# Altium PCB Gastroscopy-LED.PcbDoc
Units mm, origin at the board's own origin, x right, y up, seen from the top; angles counter-clockwise.
Board outline 4.5 x 4.5 mm, 2 copper layers (Top Layer, Bottom Layer), stack 0.486 mm thick; 8 components, 7 nets, 14 pads, 0 vias.
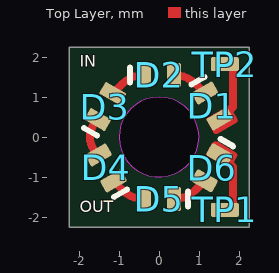
[diagram p0: Top Layer view]
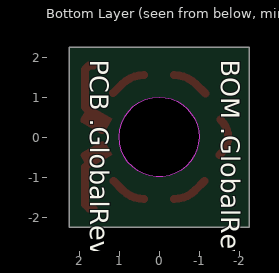
[diagram p1: Bottom Layer view, seen from below]
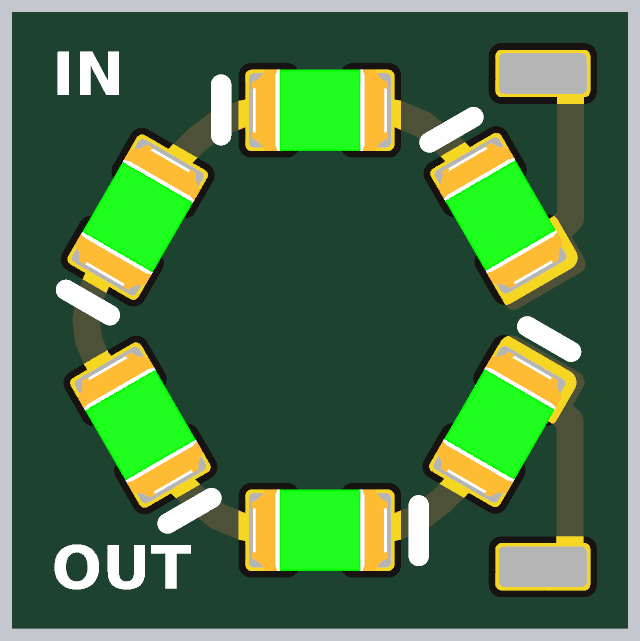
[diagram p2: 3D render of the assembled board from above, using the file's embedded part models]

## Layer stack, top to bottom
Top Solder: solder mask 0.0127, Dk 4
Top Layer: signal copper 0.018
Core 1: core 0.45, Dk 4.2
Bottom Layer: signal copper 0.018
Bottom Solder: solder mask 0.0127, Dk 4

## Board outline
-2.25,-2.25 -2.25,2.25 2.25,2.25 2.25,-2.25
cut-out: 0.776,-0.631 ccw(c0,0) 0,1 ccw(c0,0) -1,0 ccw(c0,0)

## Design rules (kind name [scope] priority, off if disabled: settings)
AcuteAngle [All] p1: minimum=3.50000000000000E+0001 checktracksonly=FALSE
BoardOutlineClearance [All] p1: gap=0.25 ignorepadtopadclearanceinfootprint=FALSE except(0: Arc-SplitContinuation Track-SplitContinuation SMDPad-SplitContinuation THPad-SplitContinuation Via-SplitContinuation Fill-SplitContinuation Poly-SplitContinuation Region-SplitContinuation Text-SplitContinuation) // Milling
Clearance Clearance-18_S [All] p1: gap=0.125 ignorepadtopadclearanceinfootprint=FALSE except(0.2: Arc-Fill Arc-Poly Track-Fill Track-Poly SMDPad-SMDPad SMDPad-Fill SMDPad-Poly THPad-Fill THPad-Poly Via-Fill Via-Poly Fill-Fill Fill-Poly Poly-Poly Poly-Region Poly-Text; 0.25: Arc-Hole Track-Hole SMDPad-Hole THPad-Hole Via-Hole Fill-Hole Poly-Hole Region-Hole Text-Hole) // Standart
ComponentClearance [All] p1: gap=0.5 collisioncheckmode=3 verticalgap=0.25 showdistances=FALSE
DiffPairsRouting "DiffPairsRouting 18" [All] p1: maxlimit=0.254 minlimit=0.1 mostfreqgap=0.25 toplayer_minwidth=0.1 toplayer_maxwidth=0.381 toplayer_prefwidth=0.35 bottomlayer_minwidth=0.1 bottomlayer_maxwidth=0.381 bottomlayer_prefwidth=0.35 maxuncoupledlength=12.7
HoleSize "Minimum HoleSize" [IsPad] p1: absolutevalues=TRUE maxlimit=5.9 minlimit=0.2 maxpercent=80.000 minpercent=20.000
HoleSize "Minimum HoleSize VIA" [IsVia] p2: absolutevalues=TRUE maxlimit=5.9 minlimit=0.2 maxpercent=80.000 minpercent=20.000 // Standart
HoleToHoleClearance Hole2HoleClearance [All] p1: gap=0.25 allowstackedmicrovias=FALSE
MinimumAnnularRing "Minimum AR VIA Standart" [IsVia] p1: minimumring=0.15
MinimumAnnularRing "Minimum AR PAD Standart" [IsPad] p2: minimumring=0.15
MinimumSolderMaskSliver "SolderMask Bridge Standart" [All] p1: minsoldermaskwidth=0.15 // All Masks
PasteMaskExpansion [All] p1: expansion=-0.025
PlaneClearance PlaneClearance-18_S [All] p1: clearance=0.2 // Standart
PlaneConnect TermalConnect-18_S [All] p1: planeconnectstyle=Relief reliefexpansion=0.2 reliefentries=4 reliefconductorwidth=0.2 reliefairgap=0.2 // Standart
PolygonConnect PolygonConnect-IND [HasFootprint('NLC453232T-4R7K-PF') vs InNet('NetD1_2')] p1: connectstyle=Relief reliefconductorwidth=0.75 reliefentries=4 polygonreliefangle="90 Angle" airgapwidth=0.2 // Standart
PolygonConnect PolygonConnect-TP [HasFootprint('TEST_POINT_SMT')] p2: connectstyle=Relief reliefconductorwidth=0.5 reliefentries=4 polygonreliefangle="90 Angle" airgapwidth=0.2 // Standart
PolygonConnect PolygonConnect-18_S [All] p3: thpad.connectstyle=Relief thpad.reliefconductorwidth=0.15 thpad.reliefentries=4 thpad.polygonreliefangle="90 Angle" thpad.airgapwidth=0.2 smdpad.connectstyle=Relief smdpad.reliefconductorwidth=0.2 smdpad.reliefentries=4 smdpad.polygonreliefangle="90 Angle" smdpad.airgapwidth=0.2 via.connectstyle=Direct via.reliefconductorwidth=0.254 via.reliefentries=4 via.polygonreliefangle="90 Angle" via.airgapwidth=0.254 // Standart
RoutingCorners [All] p1 off: cornerstyle=45-Degree minsetback=3 maxsetback=3
RoutingVias RoutingVias_S [All] p1: holewidth=0.3 width=0.45 viastyle="Through Hole" minholewidth=0.3 minwidth=0.45 maxholewidth=5.9 maxwidth=6.4 // Standart
SilkToSilkClearance [All] p1: silktosilkclearance=0.1
SilkToSolderMaskClearance [IsPad] p1: minsilkscreentomaskgap=0.1 clearancetoexposedcopper=TRUE
SolderMaskExpansion SolderMaskExpansion_VIA [IsVia] p1: expansion=0.05 istentingtop=TRUE // Standart
SolderMaskExpansion SolderMaskExpansion-1 [All] p2: expansion=0.05 istentingtop=FALSE // Standart
UnRoutedNet [All] p1: checkbadconnections=TRUE
Width Width-18_S [All] p1: maxlimit=10 minlimit=0.125 preferedwidth=0.2 checkconnectedcopper=TRUE
18 further rules are at their usual default settings.

## Classes and differential pairs
component class Overview: TP1 TP2
component class LED: D1 D2 D3 D4 D5 D6

## Components (designator, comment, footprint, x,y, rotation, side; value= is the part's Value field where it differs from the comment)
D1 "FYLS-0402PGC" L_0402_GREEN 1.333,0.774 r300 top
D2 "FYLS-0402PGC" L_0402_GREEN 0,1.55 r0 top
D3 "FYLS-0402PGC" L_0402_GREEN -1.346,0.762 r60 top
D4 "FYLS-0402PGC" L_0402_GREEN -1.325,-0.773 r120 top
D5 "FYLS-0402PGC" L_0402_GREEN 0,-1.55 r180 top
D6 "FYLS-0402PGC" L_0402_GREEN 1.325,-0.769 r240 top
TP1 "TEST_POINT_SMT" TEST_POINT_SMT 1.646,-1.82 r0 top
TP2 "TEST_POINT_SMT" TEST_POINT_SMT 1.646,1.822 r180 top

## Footprints (in the part's own frame and the unit in brackets; to place one, negate y for a bottom-side part, rotate by r counter-clockwise, add the part's x,y. Pads: shape width x height; smd on the part's side, far side on the other; paste and mask are expansions set on the pad)
L_0402_GREEN [mm] "SMD LED LAMP"
  rrect25% 0.35x0.6 smd mask+0.05: 1(-0.375,0) 2(0.375,0)
  silkscreen extent -0.73,-0.18 -0.73,0.19, body extent -0.5,-0.3 0.5,0.3, height 0.2
TEST_POINT_SMT [mm] "SMT test point, 40 mil pad"
  rrect25% 0.7x0.35 smd mask+0.05: 1(0,0)

## Part data
D1 D2 D3 D4 D5 D6: "LED GREEN CLEAR SMD", Manufacturer 1="Ningbo Foryard Optoelectronics", Manufacturer Part Number 1=FYLS-0402PGC
TP1 TP2: "STM TEST POINT"

## Nets (pads, with @x,y where several pads share a name; then routed paths per layer and width w, separated by ;. In a path a pad name is that pad's centre, name@x,y a point inside that pad or via, vN(x,y) a via of type N, cw(c..) or ccw(c..) an arc to the next point about the centre after c; other vN are vias at no path point)
NetD1_1: D1.1 D2.2 | length 0.9
  Top Layer w0.2: D2.2 cw(c0.375,0.78) 0.92,1.325 D1.1
NetD1_2: D1.2 TP2.1 | length 1.6
  Top Layer w0.2: D1.2 1.547,0.449 1.85,0.752 1.85,1.689 1.75,1.789 TP2.1@1.635,1.789
NetD2_1: D2.1 D3.2 | length 0.9
  Top Layer w0.2: D3.2 -0.92,1.325 cw(c-0.375,0.78) D2.1
NetD3_1: D3.1 D4.2 | length 1
  Top Layer w0.2: D3.1 -1.552,0.418 ccw(c-1.132,-0.003) -1.727,-0.003 ccw(c-1.167,-0.003) -1.563,-0.398 D4.2
NetD4_1: D4.1 D5.2 | length 0.9
  Top Layer w0.2: D4.1 -0.906,-1.33 ccw(c-0.375,-0.8) D5.2
NetD5_1: D5.1 D6.2 | length 0.9
  Top Layer w0.2: D5.1 ccw(c0.375,-0.81) 0.898,-1.333 D6.2
NetD6_1: D6.1 TP1.1 | length 1.7
  Top Layer w0.2: D6.1 1.543,-0.444 1.846,-0.747 1.846,-1.69 1.746,-1.79 TP1.1@1.635,-1.79

## Other copper
Top Layer:
  region net NetD6_1: 1.771,-0.795 1.942,-0.499 ccw(c1.868,-0.457) 1.911,-0.383 1.463,-0.124 ccw(c1.416,-0.205) 1.335,-0.159 1.168,-0.447
  region net NetD1_2: 1.175,0.451 1.372,0.108 ccw(c1.428,0.14) 1.46,0.085 1.925,0.354 ccw(c1.888,0.418) 1.952,0.455 1.76,0.789

## Silkscreen, mask and mechanical layers (free items; w line width, h text height)
Top Overlay:
  text "IN" at -1.977,1.663 h0.5
  text "OUT" at -1.982,-1.982 h0.5
Bottom Overlay:
  text "BOM .GlobalRevisionBOM" at -1.392,1.934 h0.8 r90
  text "PCB .GlobalRevisionPCB" at 1.884,1.934 h0.8 r90
Board Outline:
  circle w0.05: c0,0 r1
  lines w0.05: -2.25,-2.25 2.25,-2.25 2.25,2.25 -2.25,2.25 -2.25,-2.25